# EAGLE board led_cube3_shield (EAGLE 5.04)
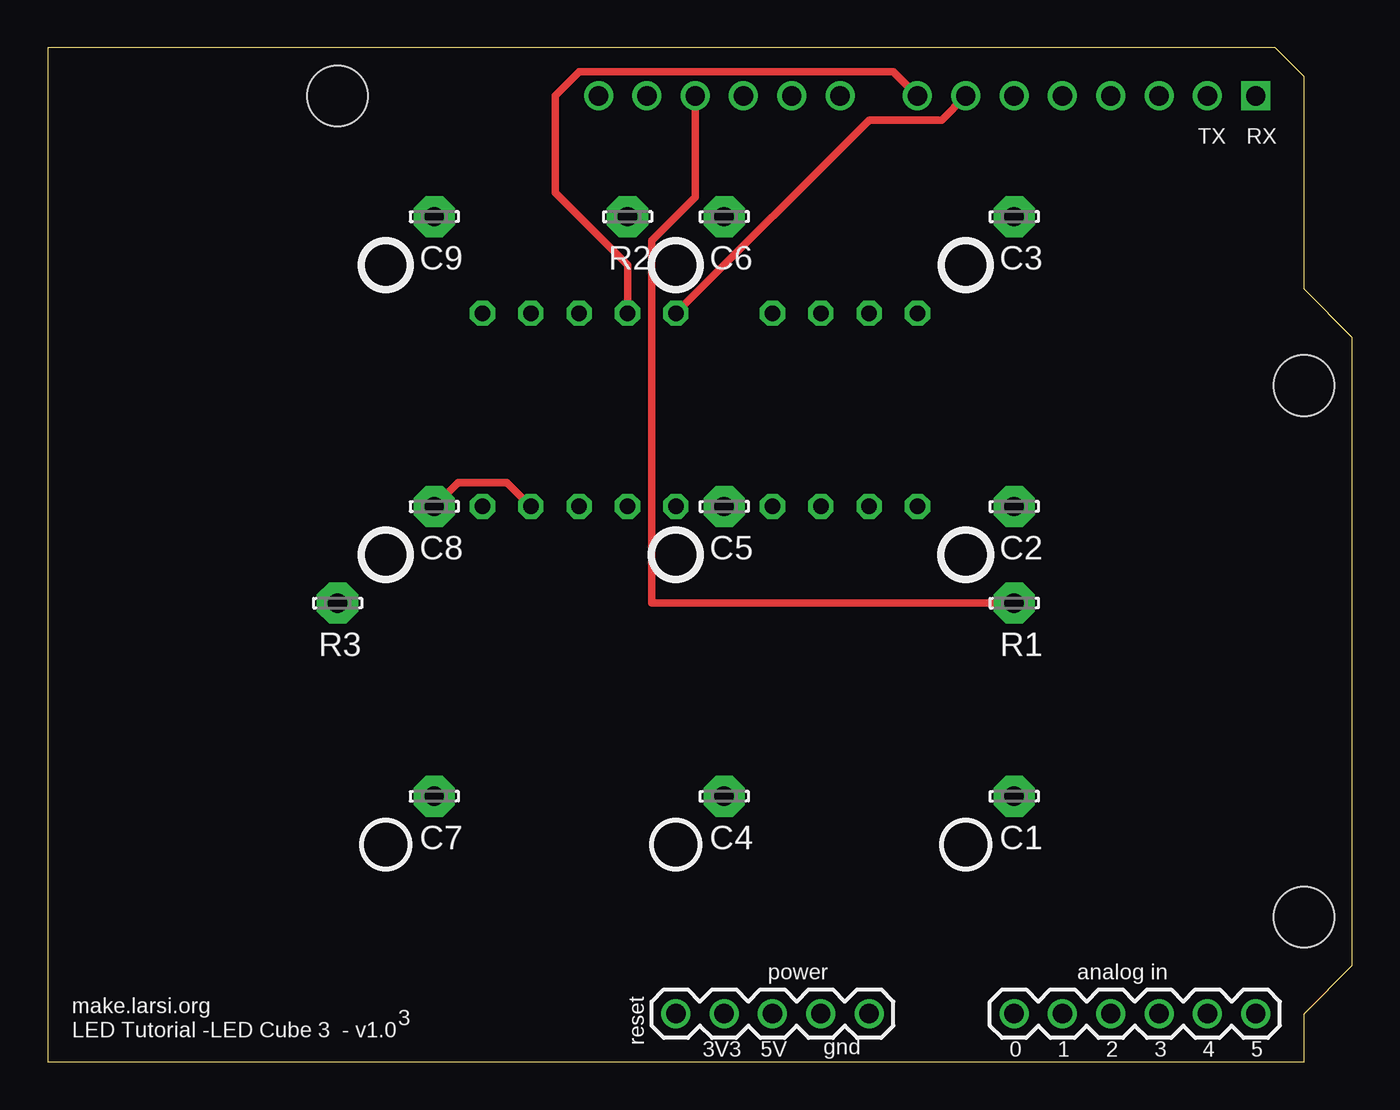
[diagram p0: board, top side]
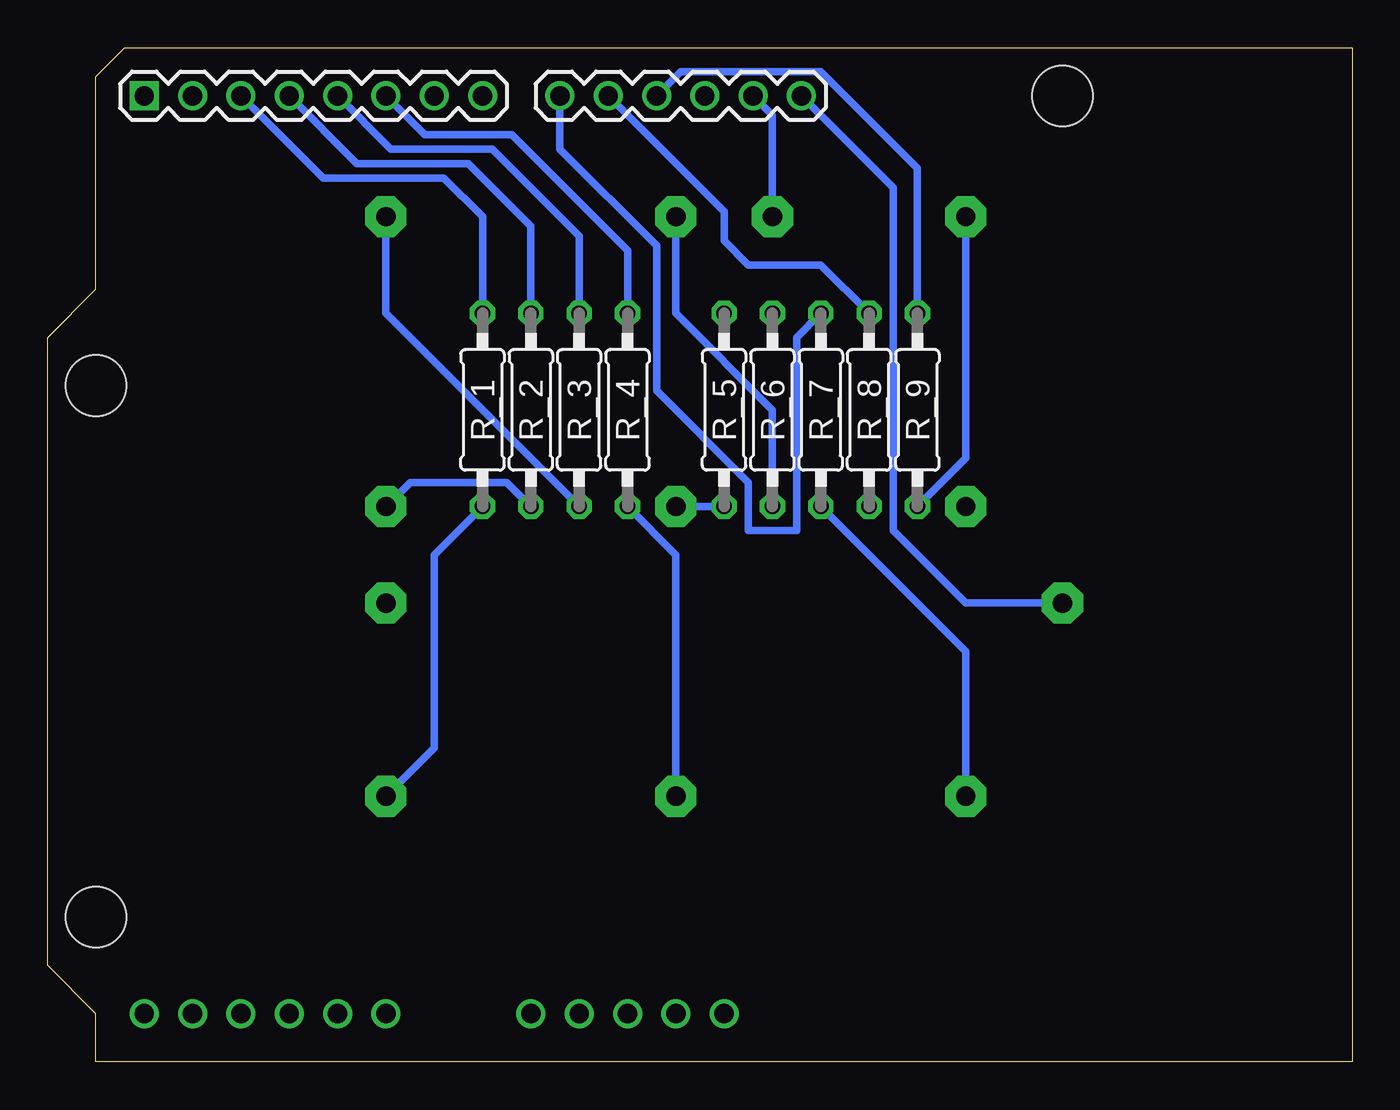
[diagram p1: board, bottom side, seen from below]

Size 68.58 x 53.34 mm. Coordinates in mm from the lower left corner, seen from the top.
Outline: 0,53.34 0,0 66.04,0 66.04,2.54 68.58,5.08 68.58,38.1 66.04,40.64 66.04,51.82 64.52,53.34 0,53.34
Copper layers (1*16): Top 0.035mm / dielectric 1.5mm / Bottom 0.035mm
Design rules "default *": minimum track width 10mil, minimum drill 24mil, track to track 8mil, track to pad 8mil, pad to pad 8mil, via to via 8mil, smd to smd 8mil, copper to edge 40mil, drill to drill 8mil, minimum pad ring 10mil, minimum via ring 8mil, stop-mask expansion 4mil, vias tented up to drill 0mil, thermal gap 10mil
Net classes: 1 power: width 0.61 mm
Holes 3.2 mm at 66.04,35.56 15.24,50.8 66.04,7.62

## Footprints (pad centres in the part's own frame; a part is rotated, then mirrored left to right if it is on the bottom)
1X06 = drill 1.016 round: 1 0,0; 2 2.54,0; 3 5.08,0; 4 7.62,0; 5 10.16,0; 6 12.7,0
LSP10 = drill 1.016 pad 2.159 octagon: MP 0,0
1X08 = drill 1.016 square: 1 0,0 | drill 1.016 round: 2 2.54,0; 3 5.08,0; 4 7.62,0; 5 10.16,0; 6 12.7,0; 7 15.24,0; 8 17.78,0
1X05 = drill 1.016 round: 1 0,0; 2 2.54,0; 3 5.08,0; 4 7.62,0; 5 10.16,0
0207/10 = drill 0.813 octagon: 1 -5.08,0; 2 5.08,0

## Placement (x,y rotation side)
A_0-5  [1X06]  63.5,2.54 180 top
C1  LSP10  [LSP10]  50.8,13.97 0 top
C2  LSP10  [LSP10]  50.8,29.21 0 top
C3  LSP10  [LSP10]  50.8,44.45 0 top
C4  LSP10  [LSP10]  35.56,13.97 0 top
C5  LSP10  [LSP10]  35.56,29.21 0 top
C6  LSP10  [LSP10]  35.56,44.45 0 top
C7  LSP10  [LSP10]  20.32,13.97 0 top
C8  LSP10  [LSP10]  20.32,29.21 0 top
C9  LSP10  [LSP10]  20.32,44.45 0 top
D_0-7  [1X08]  63.5,50.8 0 bottom
JP1  [1X06]  41.66,50.8 0 bottom
POWER  [1X05]  43.18,2.54 180 top
R1  LSP10  [LSP10]  50.8,24.13 0 top
R2  LSP10  [LSP10]  30.48,44.45 0 top
R3  LSP10  [LSP10]  15.24,24.13 0 top
R_1  [0207/10]  45.72,34.29 90 bottom
R_2  [0207/10]  43.18,34.29 90 bottom
R_3  [0207/10]  40.64,34.29 90 bottom
R_4  [0207/10]  38.1,34.29 90 bottom
R_5  [0207/10]  33.02,34.29 90 bottom
R_6  [0207/10]  30.48,34.29 90 bottom
R_7  [0207/10]  27.94,34.29 90 bottom
R_8  [0207/10]  25.4,34.29 90 bottom
R_9  [0207/10]  22.86,34.29 90 bottom

## Library data of the parts
A_0-5 D_0-7 JP1 POWER = SparkFun
C1-C9 R1-R3 = solpad
R_1-R_9 = resistor

## Nets
N$4: C9.MP R_9.1
N$5: C8.MP R_8.1
N$6: C7.MP R_7.1
N$7: C6.MP R_6.1
N$8: C5.MP R_5.1
N$9: C4.MP R_4.1
N$10: C3.MP R_3.1
N$11: C2.MP R_2.1
N$12: C1.MP R_1.1
PIN2: D_0-7.3 R_1.2
PIN3: D_0-7.4 R_2.2
PIN4: D_0-7.5 R_3.2
PIN5: D_0-7.6 R_4.2
PIN6: D_0-7.7 R_5.2
PIN7: D_0-7.8 R_6.2
PIN8: JP1.1 R_7.2
PIN9: JP1.2 R_8.2
PIN10: JP1.3 R_9.2
PIN11: JP1.4 R1.MP
PIN12: JP1.5 R2.MP
PIN13: JP1.6 R3.MP

## Tracks (layer width: path | path; a pad name or v marks a point on that pad's centre or on a via)
N$4
  Bottom 0.406: R_9.1 20.32,31.75 C9.MP
N$5
  Top 0.406: R_8.1 24.13,30.48 21.59,30.48 C8.MP
N$6
  Bottom 0.406: R_7.1 20.32,21.59 C7.MP
N$7
  Bottom 0.406: R_6.1 30.48,34.29 35.56,39.37 C6.MP
N$8
  Bottom 0.406: R_5.1 C5.MP
N$9
  Bottom 0.406: R_4.1 35.56,26.67 C4.MP
N$10
  Bottom 0.406: R_3.1 50.8,39.37 C3.MP
N$11
  Bottom 0.406: R_2.1 44.45,30.48 49.53,30.48 C2.MP
N$12
  Bottom 0.406: R_1.1 48.26,26.67 48.26,16.51 C1.MP
PIN2
  Bottom 0.406: R_1.2 45.72,44.45 47.75,46.48 54.1,46.48 D_0-7.3
PIN3
  Bottom 0.406: R_2.2 43.18,43.94 46.48,47.24 52.32,47.24 D_0-7.4
PIN4
  Bottom 0.406: R_3.2 40.64,43.43 45.21,48.01 50.55,48.01 D_0-7.5
PIN5
  Bottom 0.406: R_4.2 38.1,42.67 44.2,48.77 48.77,48.77 D_0-7.6
PIN6
  Top 0.406: R_5.2 43.18,49.53 46.99,49.53 D_0-7.7
PIN7
  Top 0.406: R_6.2 30.48,41.91 26.67,45.72 26.67,50.8 27.94,52.07 44.45,52.07 D_0-7.8
PIN8
  Bottom 0.406: R_7.2 29.21,38.1 29.21,27.94 31.75,27.94 31.75,30.48 36.58,35.31 36.58,42.93 41.66,48.01 JP1.1
PIN9
  Bottom 0.406: R_8.2 27.94,41.91 31.75,41.91 33.02,43.18 33.02,44.7 JP1.2
PIN10
  Bottom 0.406: R_9.2 22.86,46.99 27.94,52.07 35.31,52.07 JP1.3
PIN11
  Top 0.406: JP1.4 34.04,45.47 31.75,43.18 31.75,24.13 R1.MP
PIN12
  Bottom 0.406: JP1.5 30.48,49.78 R2.MP
PIN13
  Bottom 0.406: JP1.6 24.13,45.97 24.13,27.94 20.32,24.13 R3.MP

## Text on the board
tNames: TX | RX | power | analog in | make.larsi.org | 3 | LED Tutorial -LED Cube 3 - v1.0 | reset | 3V3 | 5V | gnd | 0 | 1 | 2 | 3 | 4 | 5